# Altium PCB Copy of PCB1.PcbDoc
Units mil, origin at the board's own origin, x right, y up, seen from the top; angles counter-clockwise.
Board outline 6000 x 4000 mil, 2 copper layers (Top Layer, Bottom Layer); 43 components, 27 nets, 114 pads, 5 vias.
Unrouted connection lines stored in the file: 26.
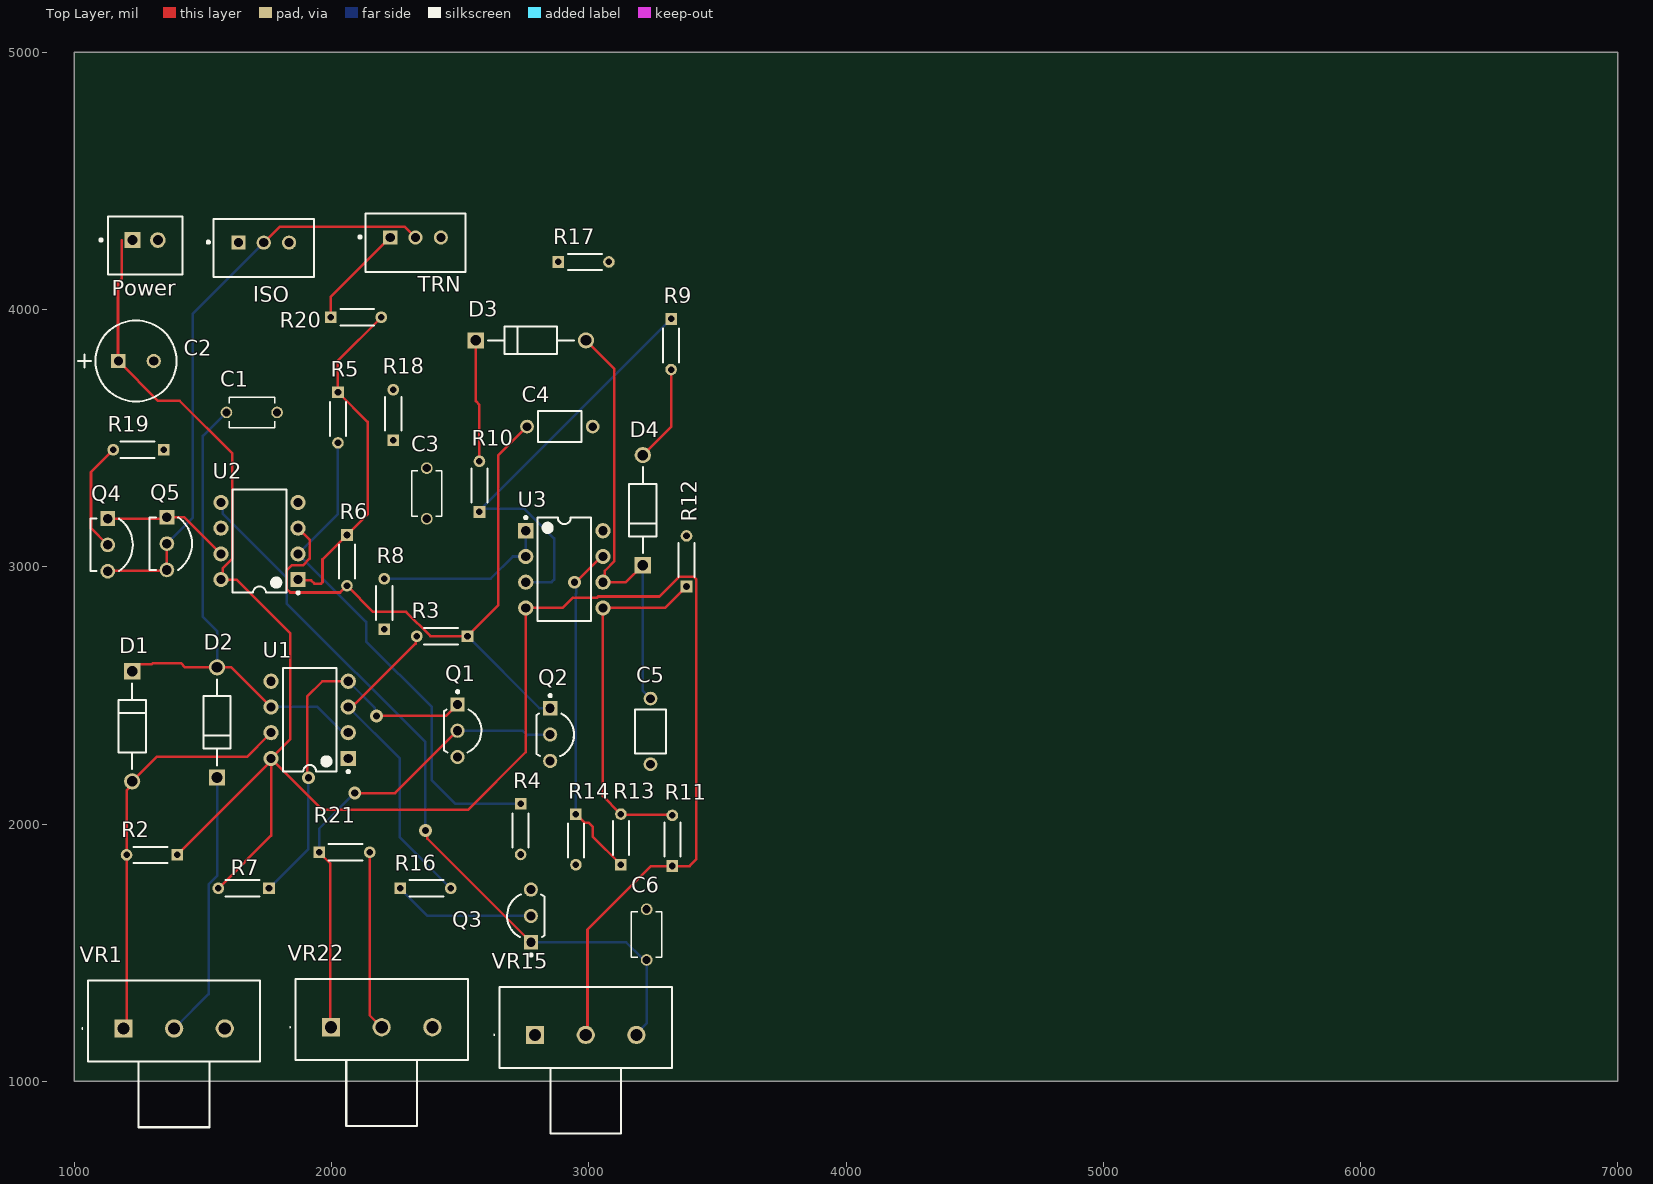
[diagram p0: Top Layer view]
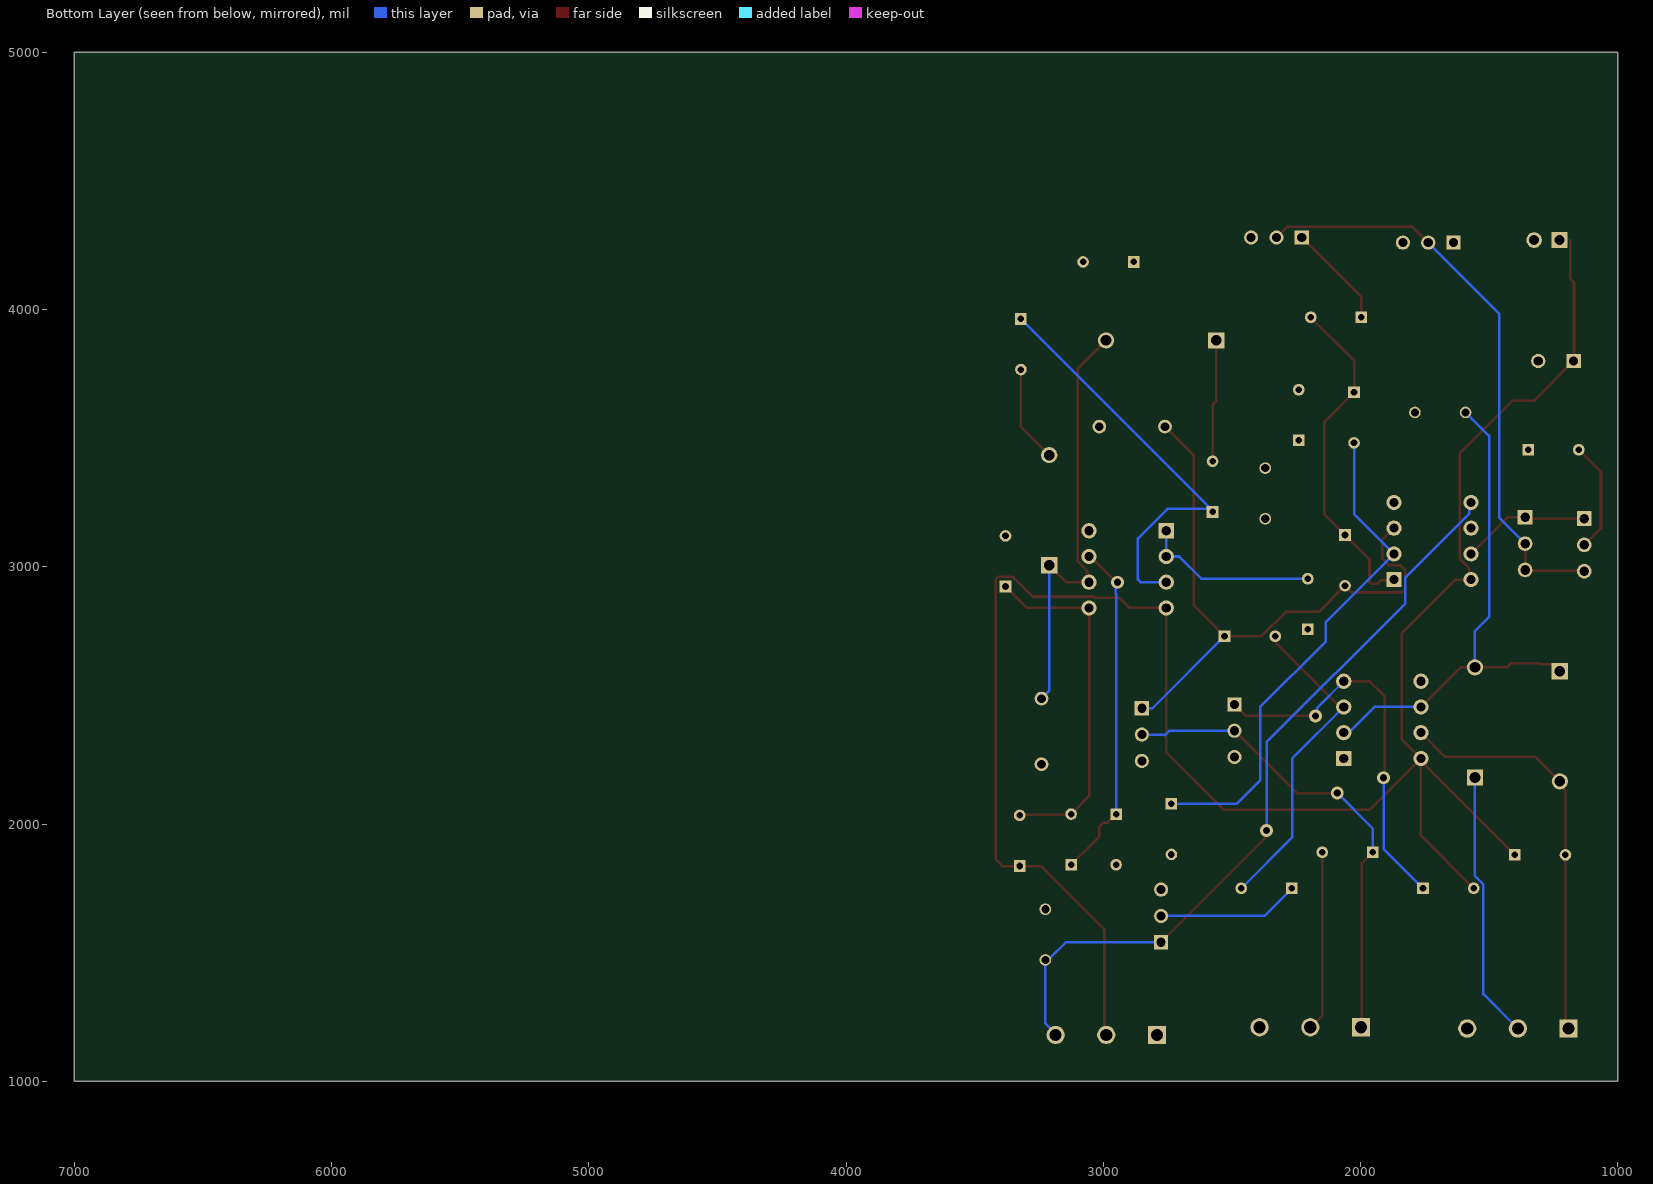
[diagram p1: Bottom Layer view, seen from below]

## Layer stack, top to bottom
Top Solder: solder mask 0.4, Solder Resist, Dk 3.5
Top Layer: signal copper 1.4
Dielectric 1: dielectric 12.6, FR-4, Dk 4.8
Bottom Layer: signal copper 1.4
Bottom Solder: solder mask 0.4, Solder Resist, Dk 3.5

## Board outline
1000,1000 7000,1000 7000,5000 1000,5000

## Design rules (kind name [scope] priority, off if disabled: settings)
Clearance [All] p1: gap=10 ignorepadtopadclearanceinfootprint=FALSE except(0: Arc-Hole Track-Hole SMDPad-Hole THPad-Hole Via-Hole Fill-Hole Poly-Hole Region-Hole Text-Hole)
PolygonConnect [All] p1: connectstyle=Relief reliefconductorwidth=10 reliefentries=4 polygonreliefangle="90 Angle" airgapwidth=10
RoutingVias [All] p1: holewidth=28 width=50 viastyle="Through Hole" minholewidth=28 minwidth=50 maxholewidth=28 maxwidth=50
SolderMaskExpansion [All] p1: expansion=4 istentingtop=FALSE
Width [All] p1: maxlimit=10 minlimit=10 preferedwidth=10
30 further rules are at their usual default settings.

## Components (designator, comment, footprint, x,y, rotation, side; value= is the part's Value field where it differs from the comment)
C1 "FG24X7R1A106KRT00" CAPRB500W50L450T300H550 1690,3600 r180 top
C2 "ECA-2AM470" CAPPR65-350-1150X800X1250 1240,3800 r0 top
C3 "FG24X7R1A106KRT00" CAPRB500W50L450T300H550 2370,3285 r90 top
C4 "SA115C104KAR" AVX-SA115C104KAR 2887.56,3545 r0 top
C5 "SA115C104KAR" AVX-SA115C104KAR 3240,2360 r90 top
C6 "FG24X7R1A106KRT00" CAPRB500W50L450T300H550 3225,1570 r90 top
D1 "1N4001-E3/54" FP-1N4001-E3-54-MFG 1225,2380 r270 top
D2 "1N4001-E3/54" FP-1N4001-E3-54-MFG 1555,2395 r90 top
D3 "1N4001-E3/54" FP-1N4001-E3-54-MFG 2775,3880 r0 top
D4 "1N4001-E3/54" FP-1N4001-E3-54-MFG 3210,3220 r90 top
OSI "to osilascope" FP-B3B-XH-A_LF_SN-MFG 1736.57,4239.33 r0 top
Power "B2B-XH-A(LF)(SN)" FP-B2B-XH-A_LF_SN-MFG 1275.79,4249.33 r0 top
Q1 "P2N2222ARL1G" ONSC-TO-92-3-29-11_AM_BL 2490,2362.64 r270 top
Q2 "P2N2222ARL1G" ONSC-TO-92-3-29-11_AM_BL 2850,2347.64 r270 top
Q3 "P2N2222ARL1G" ONSC-TO-92-3-29-11_AM_BL 2775,1642.64 r90 top
Q4 "2N3906TF" FP-135AR-MFG 1144.96,3085 r0 top
Q5 "2N3906TF" FP-135AR-MFG 1375,3090 r0 top
R2 "MRS16000C2002FCT00" FP-MRS1600-MFG 1301.57,1880 r180 top
R3 "MRS16000C2002FCT00" FP-MRS1600-MFG 2430,2730 r180 top
R4 "MRS16000C2002FCT00" FP-MRS1600-MFG 2735,1980 r270 top
R5 "MRS16000C2002FCT00" FP-MRS1600-MFG 2025,3580 r270 top
R6 "MRS16000C2002FCT00" FP-MRS1600-MFG 2060,3025 r270 top
R7 "MRS16000C2002FCT00" FP-MRS1600-MFG 1658.43,1750 r180 top
R8 "MRS16000C2002FCT00" FP-MRS1600-MFG 2205,2855 r90 top
R9 "MRS16000C2002FCT00" FP-MRS1600-MFG 3320,3865 r270 top
R10 "MRS16000C2002FCT00" FP-MRS1600-MFG 2575,3311.57 r90 top
R11 "MRS16000C2002FCT00" FP-MRS1600-MFG 3325,1935 r90 top
R12 "MRS16000C2002FCT00" FP-MRS1600-MFG 3380,3021.57 r90 top
R13 "MRS16000C2002FCT00" FP-MRS1600-MFG 3125,1940 r90 top
R14 "MRS16000C2002FCT00" FP-MRS1600-MFG 2950,1940 r270 top
R16 "MRS16000C2002FCT00" FP-MRS1600-MFG 2365,1750 r0 top
R17 "MRS16000C2002FCT00" FP-MRS1600-MFG 2980,4185 r0 top
R18 "MRS16000C2002FCT00" FP-MRS1600-MFG 2240,3590 r90 top
R19 "MRS16000C2002FCT00" FP-MRS1600-MFG 1250,3455 r180 top
R20 "MRS16000C2002FCT00" FP-MRS1600-MFG 2095,3970 r0 top
R21 "MRS16000C2002FCT00" FP-MRS1600-MFG 2050,1890 r0 top
TRN "B3B-XH-A(LF)(SN)" FP-B3B-XH-A_LF_SN-MFG 2326.57,4259.33 r0 top
U1 "NE555P" P0008A 1915,2405 r180 top
U2 "NE5532N" ONSC-PDIP-8-626-05 1720,3100 r180 top
U3 "TL072CP" P0008A 2905,2990 r0 top
VR1 "PTN16-B50120K1A1" PTN16B50120K1A1 1191.3,1205 r180 top
VR15 "PTN16-B50120K1A1" PTN16B50120K1A1 2791.3,1180 r180 top
VR22 "PTN16-B50120K1A1" PTN16B50120K1A1 1998.15,1210 r180 top

## Footprints (in the part's own frame and the unit in brackets; to place one, negate y for a bottom-side part, rotate by r counter-clockwise, add the part's x,y. Pads: shape width x height; smd on the part's side, far side on the other; paste and mask are expansions set on the pad)
AVX-SA115C104KAR [mm] "THD, 2-Leads, Dia 3.05mm, Body Length 4.32mm"
  round 1.35 hole 0.85: 1(-3.24,0) 2(3.24,0)
  silkscreen extent -2.16,-1.53 2.16,1.53, body extent -3.53,-1.52 3.53,1.52, height 3.05
CAPPR65-350-1150X800X1250 [mm] "THD, 2-Leads, Dia 8mm, Body 11.5mm"
  rect 1.4x1.4 hole 0.9: 1(-1.75,0)
  round 1.4 hole 0.9: 2(1.75,0)
  silkscreen extent -5.71,-4 4,4, body extent -4,-4 4,4, height 12.5
CAPRB500W50L450T300H550 [mm]
  round 1.15 hole 0.8: 1(-2.5,0) 2(2.5,0)
  silkscreen extent -2.25,-1.5 2.25,1.5, body extent -2.75,-1.5 2.75,1.5, height 2.75
FP-1N4001-E3-54-MFG [mm]
  rect 1.6x1.6 hole 1.05 paste-1000 mask+0: 1(-5.438,0)
  round 1.6 hole 1.05 paste-1000 mask+0: 2(5.438,0)
  silkscreen extent -4.24,-1.35 4.24,1.35, body extent -6.34,-1.45 6.34,1.45, height 0.25
FP-135AR-MFG [mm]
  rect 1.45x1.45 hole 0.95 paste-1000 mask+0: 1(-0.38,2.6)
  round 1.45 hole 0.95 paste-1000 mask+0: 2(-0.38,0) 3(-0.38,-2.6)
  silkscreen extent -2.09,-2.6 2.09,2.6, body extent -2.19,-3.42 2.19,3.42, height 0.25
FP-B2B-XH-A_LF_SN-MFG [mm]
  rect 1.55x1.55 hole 1 paste-1000 mask+0: 1(-1.25,0.525)
  round 1.55 hole 1 paste-1000 mask+0: 2(1.25,0.525)
  silkscreen extent -4.5,-2.88 3.7,2.88, body extent -3.8,-2.98 3.8,2.98, height 0.25
FP-B3B-XH-A_LF_SN-MFG [mm]
  rect 1.4x1.4 hole 0.9 paste-1000 mask+0: 1(-2.5,0.525)
  round 1.4 hole 0.9 paste-1000 mask+0: 2(0,0.525) 3(2.5,0.525)
  silkscreen extent -5.6,-2.88 4.95,2.88, body extent -5.05,-2.98 5.05,2.98, height 0.25
FP-MRS1600-MFG [mm]
  rect 1.15x1.15 hole 0.65 paste-1000 mask+0: 1(-2.5,0)
  round 1.15 hole 0.65 paste-1000 mask+0: 2(2.5,0)
  silkscreen extent -1.55,-0.8 1.8,0.8, body extent -3.17,-0.9 3.17,0.9, height 0.25
ONSC-PDIP-8-626-05 [mm] "DIP, 8-Leads, Body 10.15x7.1mm, Pitch 2.54mm"
  rect 1.5x1.5 hole 0.9: 1(-3.81,3.81)
  round 1.5 hole 0.9: 2(-3.81,1.27) 3(-3.81,-1.27) 4(-3.81,-3.81) 5(3.81,-3.81) 6(3.81,-1.27) 7(3.81,1.27) 8(3.81,3.81)
  silkscreen extent -3.94,-5.1 2.65,5.23, body extent -3.95,-5.07 3.95,5.07, height 5.33
ONSC-TO-92-3-29-11_AM_BL [mm] "TO, 3-Leads, Body Dia 4.7mm, Pitch 2.6mm"
  rect 1.4x1.4 hole 0.9: 1(-2.6,0)
  round 1.4 hole 0.9: 2(0,0) 3(2.6,0)
  silkscreen extent -3.97,-1.34 2.13,2.35, body extent -2.84,-1.34 2.84,2.35, height 5.33
P0008A [mm] "DIP, 8-Leads, Body 10.15x6.6mm, Pitch 2.54mm"
  rect 1.5x1.5 hole 0.9: 1(-3.81,3.81)
  round 1.5 hole 0.9: 2(-3.81,1.27) 3(-3.81,-1.27) 4(-3.81,-3.81) 5(3.81,-3.81) 6(3.81,-1.27) 7(3.81,1.27) 8(3.81,3.81)
  silkscreen extent -3.94,-5.1 2.65,5.23, body extent -3.95,-5.07 3.95,5.07, height 5.08
PTN16B50120K1A1 [mm]
  rect 1.8x1.8 hole 1.2: 1(0,0)
  round 1.8 hole 1.2: 2(-5,0) 3(-10,0)
  silkscreen extent -13.5,-4.75 4.1,9.75

## Part data
C1 C3 C6: "10 ÂµF Â±10% 10V Ceramic Capacitor X7R Radial", Package="Radial TDK", Availability="In Stock", Check_prices=https://www.snapeda.com/parts/FG24X7R1A106KRT00/TDK/view-part/?ref=eda, MF=TDK, MP=FG24X7R1A106KRT00, Price=None, Purchase-URL=https://pricing.snapeda.com/search/part/FG24X7R1A106KRT00/?ref=eda, SnapEDA_Link=https://www.snapeda.com/parts/FG24X7R1A106KRT00/TDK/view-part/?ref=snap
C2: library part CMP-1665-00041-1, "Aluminum Electrolytic Capacitor, 47 uF, +/- 20%, 100 V, -40 to 85 degC, 2-Pin THD, RoHS, Bulk", Case\Package=QFN, Max Operating Temperature="70 degC", Min Operating Temperature="-20 degC", Nominal Supply Voltage="3.3 V", Package Quantity=500, ComponentLink1Description="Manufacturer URL", ComponentLink1URL=http://www.panasonic.com/, ComponentLink2Description=Datasheet, ComponentLink2URL=http://industrial.panasonic.com/cdbs/www-data/pdf/RDF0000/ABA0000C1047.pdf, Data Rate="54 mbps", DatasheetVersion=Mar-16, Length="7.7 mm", Mount="Surface Mount", PackageDescription="2-Pin Radial Lead, Dia 8 mm, Body Length 11.5 mm", PackageReference=CAPPR65-350-1150X800X1250, Packaging="Tape and Reel", Pins=48, Radiation Hardening=No, RoHSCompliant=true
C4 C5: library part CMP-2000-07029-1, "Axial Leads / SpinGuard(R), Ceramic Capacitor, 0.10 uF +/- 10%, 50V, -55 to 125 degC, 2-Pin THD, RoHS, Tape and Reel", Capacitance=0.1µF, Manufacturer=AVX, Operating Temperature=-55°C~125°C, Package / Case=Axial, Package Description="2-Pin Axial Lead, Dia 3.05 mm, Body Length 4.32 mm", Ratings=-, Standard Package=1, Temperature Coefficient=X7R, Tolerance=±10%, Voltage - Rated=50V, Applications=GeneralPurpose, Catalog Drawings=SASeries_4.32x3.05, Category=Capacitors, Datasheet URL=https://datasheet.ciiva.com/27051/1074183-27051369.pdf, Datasheet Version=06/2007, Family=CeramicCapacitors, Features=-, Height - Seated (Max)=-, Lead Spacing=-, Lead Style=-, Manufacturer URL=http://www.avx.com/, Mounting Technology=ThroughHole, Mounting Type=ThroughHole, Online Catalog=SpinGuard®SASeries, Other Names=478-3151-1, Package Reference=SA115C104KAR, Packaging=-, Product Training Modules=ComponentSolutionsforSmartMeterApplications, Series=SpinGuard®SA, Size / Dimension="0.120\"Diax0.170\"L(3.05mmx4.32mm)", Thickness (Max)=-
D1 D2 D3 D4: library part CMP-02540-000077-1, "DIODE GEN PURP 50V 1A DO204AL", Average Rectified Current=1A, Capacitance=15pF, Case/Package=DO-204AL, Forward Voltage=1.1V, Max Forward Surge Current (Ifsm)=30A, Max Operating Temperature=150°C, Max Repetitive Reverse Voltage (Vrrm)=50V, Max Reverse Current=5uA, Min Operating Temperature=-50°C, Package Quantity=5500, Peak Non-Repetitive Surge Current=45A, Current=1A, Current Rating=1A, Diameter=2.7mm, Element Configuration=Single, Forward Current=1A, Height=2.7mm, Lead Free="Lead Free", Length=0.204inch, Max Reverse Voltage (DC)=50V, Max Surge Current=30A, Mount="Through Hole", Number of Pins=2, Output Current=1A, Packaging="Tape and Reel", Polarity=Standard, Radiation Hardening=No, Reverse Voltage=50V, RoHS Compliant=Yes, Series=-, Voltage=50V, Voltage Rating (DC)=50V, Width=2.7mm
OSI TRN: library part CMP-17439-000014-3, "CONN HEADER VERT 3POS 2.5MM", Color=Natural, Contact Resistance=20mR, Current Rating=3A, Flammability Rating="UL94 V-0", Housing Color=White, Insulation Resistance=1GR, Max Operating Temperature=85°C, Max Voltage Rating (AC)=250V, Min Operating Temperature=-25°C, Connector Type=Header, Contact Finish - Mating=TIN, Contact Material=Brass, Contact Plating=Tin, Contact Shape=Square, Contact Type="Male Pin", Depth=5.75mm, Fastening Type=Detent, Gender=Male, Housing Material=Polyamide, Insulation Color=Natural, Insulation Material=Nylon, Lead Free="Lead Free", Lead Pitch=2.5mm, Length=9.9mm, Max Current Rating=3A, Max Voltage Rating (DC)=250V, Mount="Through Hole", Number of Contacts=3, Number of Positions=3, Number of Rows=1, Orientation=Straight, Packaging=Bulk, Pitch=2.5mm, REACH SVHC="No SVHC", Series=XH, Termination=Solder, Voltage Rating=250V, Voltage Rating (AC)=250V, Wire/Cable Gauge=22AWG
Power: library part CMP-2000-05888-3, "CONN HEADER VERT 2POS 2.5MM", Color=Natural, Contact Resistance=20mR, Current Rating=3A, Housing Color=White, Insulation Resistance=1GR, Max Operating Temperature=85°C, Max Voltage Rating (AC)=250V, Min Operating Temperature=-25°C, Connector Type="Male Pin", Contact Material=Brass, Contact Plating=Tin, Contact Type="Male Pin", Depth=5.75mm, Fastening Type=Detent, Housing Material=Polyamide, Lead Free="Lead Free", Lead Pitch=2.5mm, Length=7.4mm, Max Current Rating=3A, Max Voltage Rating (DC)=250V, Mount="Through Hole", Number of Contacts=2, Number of Positions=2, Number of Rows=1, Orientation=Straight, Packaging=Bulk, Pitch=2.5mm, REACH SVHC="No SVHC", Series=XH, Termination=Solder, Voltage Rating=250V, Voltage Rating (AC)=250V, Wire/Cable Gauge=22AWG
Q1 Q2 Q3: library part CMP-1048-01587-1, "Amplifier Transistor, NPN Silicon, 3-Pin TO-92, Pb-Free, Tape and Reel", Manufacturer="On Semiconductor", ComponentLink1Description="Manufacturer URL", ComponentLink1URL=http://www.onsemi.com/, ComponentLink2Description=Datasheet, ComponentLink2URL=http://www.onsemi.com/pub_link/Collateral/P2N2222A-D.PDF, ComponentLink3Description="Package Specification", ComponentLink3URL=http://www.onsemi.com/pub_link/Collateral/MAC97-D.PDF, DatasheetVersion="Rev. 7", fT Min (MHz)=300, IC Continuous (A)=0.6, Mounting Technology="Through Hole", PackageDescription="3-Pin Transistor Outline, Body 4.825 x 3.685 mm, Pitch 1.27 mm", PackageReference=TO-92-3-29-11_AM_BL, PackageVersion="Rev. AM", Packing="Tape and Reel", PartNumber=P2N2222ARL1G, Polarity=NPN, RoHS=TRUE
Q4 Q5: library part CMP-00278-84408866-1, "2N3906TF Small Signal Bipolar Transistor, 0.2A I(C), 40V V(BR)CEO, 1-Element, PNP, Silicon, TO-92", Case/Package=TO-92, Collector Base Voltage (VCBO)=-40V, Collector Emitter Saturation Voltage=-400mV, Current Rating=-200mA, Emitter Base Voltage (VEBO)=-5V, Frequency=250MHz, Manufacturer Lifecycle Status=ACTIVE, Max Breakdown Voltage=160V, Max Junction Temperature (Tj)=150°C, Max Power Dissipation=625mW, Min Operating Temperature=-55°C, Collector Emitter Breakdown Voltage=-40V, Collector Emitter Voltage (VCEO)=-40V, Element Configuration=Single, Gain Bandwidth Product=250MHz, Height=5.33mm, hFE Min=100, Lead Free="Lead Free", Length=5.2mm, Lifecycle Status=Production, Max Collector Current=-200mA, Max Frequency=250MHz, Max Operating Temperature=150°C, Mount="Through Hole", NexarPartId=84408866, Number of Elements=1, Number of Pins=3, Packaging="Tape and Reel", Polarity=PNP, Power Dissipation=625mW, Radiation Hardening=No, REACH SVHC="No SVHC", RoHS=Compliant, Schedule B=8541210080, Transition Frequency=250MHz, Voltage Rating (DC)=-40V, Weight=240mg, Width=4.19mm
R2 R3 R4 R5 R6 R7 R8 R9 R10 R11 R12 R13 R14 R16 R17 R18 R19 R20 R21: library part CMP-02408-000019-1, "RES 20K OHM 0.4W 1% AXIAL", Case/Package=Conformal, Max Operating Temperature=155°C, Max Power Dissipation=400mW, Min Operating Temperature=-55°C, Resistance=20kR, Resistor Type="Metal Film", Temperature Coefficient=50ppm/°C, Tolerance=1%, Construction=Cylindrical, Contact Plating=Tin, Diameter=1.6mm, Length=3.6mm, Military Standard=Not, Mount="Through Hole", Number of Terminations=2, Packaging="Tape and Reel", Power Rating=400mW, Radiation Hardening=No, RoHS Compliant=Yes, Series=MRS16, Technology="THIN FILM", Termination=Axial
U1: library part CMP-2000-04954-1, "Precision Timer, 4.5 to 16 V, 0 to 70 degC, 8-Pin DIP, Pb-Free, Tube", Manufacturer=TexasInstruments, Maximum High Level Output Current=-200mA, Maximum Low Level Output Current=200mA, Operating Supply Voltage=5, Package=8PDIP, Package Description="8-Pin Double In-line Package, Body 9.59 x 6.35 mm, Pitch 2.54 mm", Package Reference=P8, Category=Timer, Datasheet URL=http://www.ti.com/general/docs/lit/getliterature.tsp?genericPartNumber=NE555&fileType=pdf, Datasheet Version="Rev. I, 09/2014", Manufacturer URL=http://www.ti.com/, Number of Internal Timers=1, Package URL=http://www.ti.com/lit/ml/mpdi001b/mpdi001b.pdf, Packaging=Rail/Tube, Rad Hard=No, Type=Standard
U2: library part CMP-1310-00070-1, "Internally Compensated Dual Low Noise Operational Amplifier, 6 to 40 V, 0 to 70 degC, 8-Pin PDIP, Tube", Manufacturer="On Semiconductor", ComponentLink1Description="Manufacturer URL", ComponentLink1URL=http://www.onsemi.com/, ComponentLink2Description=Datasheet, ComponentLink2URL=http://www.onsemi.cn/pub_link/Collateral/NE5532-D.PDF, ComponentLink3Description="Package Specification", ComponentLink3URL=http://www.onsemi.cn/pub_link/Collateral/626-05.PDF, DatasheetVersion="Rev. 2", GBW Typ (MHz)=10, Mounting Technology="Through Hole", PackageDescription="8-Pin Plastic Dual-In Line Package, Body 9.59 x 6.605 mm, Pitch 2.54 mm", PackageReference=PDIP-8-626-05, PackageVersion="Rev. N, 06/2013", Packing=Tube, PartNumber=NE5532N, RoHS=FALSE, SR Typ (V/uS)=9, VCC Max (V)=40, VCC Min (V)=6
U3: library part CMP-0017-00950-2, "Dual Low-Noise JFET-Input General-Purpose Operational Amplifier, 7 to 36 V, 0 to 70 degC, 8-pin DIP (P8), Pb-Free (RoHS)", Manufacturer="Texas Instruments", Rating=Catalog, Total Supply Voltage(Max)(+5V is 5, +/-5V is 10)=36, Total Supply Voltage(Min)(+5V is 5, +/-5V is 10)=7, CMRR(Min)(dB)=70, Code_JEDEC=MS-001, ComponentLink1Description="Manufacturer URL", ComponentLink1URL=http://www.ti.com/, ComponentLink2Description=Datasheet, ComponentLink2URL=http://www.ti.com/lit/ds/symlink/tl072.pdf, ComponentLink3Description="Package Specification", ComponentLink3URL=http://www.ti.com/litv/pdf/mpdi001b, DatasheetVersion=SLOS080J, Eco-Plan="Pb-Free (RoHS)", GBW(Typ)(MHz)=3, IIB(Max)(pA)=200, Iq per channel(Max)(mA)=2.5, Mounting Technology="Through Hole", Number of Channels=2, Offset Drift(Typ)(uV/C)=18, PackageDescription="8-Pin Plastic In-Line, Body 9.59 x 6.35 mm, Pitch 2.54 mm", PackageReference=P0008A, PackageVersion="4040082/E, 04/2010", PartNumber=TL072CP, Slew Rate(Typ)(V/us)=13, Sub Family="General Purpose Amplifier, High Supply Voltage Amplifier (>=30V)", Vio (25C)(Max)(mV)=10, Vn at 1kHz(Typ)(nV/rtHz)=18
VR1 VR15 VR22: "Variable Resistor", Manufacturer_Name="CUI Devices", Datasheet Link=https://www.cuidevices.com/product/resource/ptn16.pdf, Height=26.75mm, Manufacturer_Part_Number=PTN16-B50120K1A1

## Via types
v1: diameter 50, hole 28, Top Layer to Bottom Layer, 5 vias

## Nets (pads, with @x,y where several pads share a name; then routed paths per layer and width w, separated by ;. In a path a pad name is that pad's centre, name@x,y a point inside that pad or via, vN(x,y) a via of type N, cw(c..) or ccw(c..) an arc to the next point about the centre after c; other vN are vias at no path point)
GND: C1.1 C2.2 C3.2 C4.2 C5.1 C6.2 OSI.1 Power.2 Q1.3 Q2.3 Q3.3 R4.2 R12.2 R14.2 R17.2 R19.1 TRN.3 U1.1 U2.4 U3.8
NetC1_2: C1.2 D1.1 D2.2 U1.2 U1.6 | length 2035
  Top Layer w10: D1.1@1215.91,2585 D1.1 1251.5,2620.59 1300.59,2620.59 1305,2625 1414.88,2625 1430.78,2609.09 D2.2 1610.91,2609.09 1755,2465 1765,2465 U1.6
  Bottom Layer w10: D2.2 1555,2750 1500,2805 1500,3508.43 C1.2 ; U1.6 1945,2455 2040,2360 2060,2360 U1.2
NetC3_1: C3.1 U1.5
NetC4_1: C4.1 Q2.1 R3.1 R6.2 U2.3 | length 2466.2
  Top Layer w10: U2.3 1914.53,3105.47 1914.53,3031.56 1888.44,3005.47 1845.2,3005.47 1825.47,2985.74 1825.47,2914.26 1839.73,2900 2033.35,2900 2059.92,2926.57 R6.2 2161.66,2824.91 2289.89,2824.91 2384.8,2730 R3.1 2648.9,2850.48 2648.9,3433.9 C4.1
  Bottom Layer w10: R3.1 2808.43,2450 Q2.1
NetC5_2: C5.2 D3.2 D4.1 U3.6 | length 1718.8
  Top Layer w10: D3.2 3099.53,3769.57 3099.53,3021.56 3062.5,2984.53 3062.5,2947.5 U3.6 3144.09,2940 D4.1
  Bottom Layer w10: D4.1 3210,2517.56 3230,2497.56 3230,2495 3237.44,2487.56 C5.2
NetC6_1: C6.1 Q3.1 U2.5 VR15.3 | length 3002.3
  Top Layer w10: v1(2365,1975) 2372.65,1967.35 2372.65,1942.62 Q3.1
  Bottom Layer w10: U2.5 1577.5,3242.5 1577.5,3205.47 1825.47,2957.5 1825.47,2857.5 2365,2317.97 v1(2365,1975) ; Q3.1 3144.72,1540.28 3206.68,1478.32 3208.7,1478.32 C6.1@3220,1467.03 ; VR15.3 3185,1175 3190,1180 3190,1189.82 3225,1224.82 C6.1
NetD1_2: D1.2 R2.2 U1.7 VR1.1 | length 1608
  Top Layer w10: VR1.1@1185,1200 VR1.1@1190,1205 ; VR1.1 VR1.1@1190,1205 ; U1.7 1755,2355 1755,2345 1670.83,2260.83 1319.92,2260.83 D1.2 1225,2151.57 1203.15,2129.72 R2.2 1203.15,1218.15 VR1.1@1190,1205
NetD2_1: D2.1 VR1.2 | length 1046.1
  Bottom Layer w10: VR1.2 1390,1205 1395,1210 1395,1211.85 1522.36,1339.21 1522.36,1765.59 1555,1798.23 D2.1
NetD3_1: D3.1 R10.2 | length 478.5
  Top Layer w10: D3.1 2560.91,3643.57 2575,3629.48 2575,3413.95 2577.47,3411.48 2576,3410 R10.2
NetD4_2: D4.2 R9.2 | length 378
  Top Layer w10: D4.2 3320,3544.09 R9.2
NetOSI_2: OSI.2 Q4.3 Q5.2 Q5.3 TRN.2 | length 2303.6
  Top Layer w10: Q4.3 1132.5,2985.14 1360.14,2985.14 1362.64,2987.64 Q5.3@1361.34,2987.64 ; Q5.3 Q5.3@1361.34,2987.64 ; Q5.2 1360.04,2988.94 Q5.3@1361.34,2987.64 ; OSI.2 1799.13,4322.56 2284.02,4322.56 2320,4286.57 2320,4280 TRN.2
  Bottom Layer w10: Q5.2 1460,3189.96 1460,3983.43 OSI.2
NetOSI_3: OSI.3 Q4.2 R19.2 | length 432.8
  Top Layer w10: Q4.2 1065,3150 1065,3368.43 R19.2
NetQ1_1: Q1.1 R7.1 U1.4 | length 1509.6
  Top Layer w10: v1(1910,2180) 1905,2185 1905,2495 1965,2555 U1.4 ; v1(2175,2420) 2445,2420 Q1.1
  Bottom Layer w10: R7.1 1910,1903.15 v1(1910,2180) ; U1.4 2167.35,2452.65 2167.35,2427.65 v1(2175,2420)
NetQ1_2: Q1.2 Q2.2 R21.1 VR22.1 | length 1905.5
  Top Layer w10: R21.1 1995,1846.57 1995,1185 1998.15,1188.15 VR22.1 ; v1(2090,2120) 2247.36,2120 Q1.2
  Bottom Layer w10: R21.1 1951.57,1981.57 v1(2090,2120) ; Q1.2 2742.36,2362.64 2760,2345 2762.64,2347.64 Q2.2
NetQ3_2: Q3.2 R16.1 | length 555.1
  Bottom Layer w10: R16.1 2373.94,1642.64 2767.36,1642.64 2770,1640 2772.64,1642.64 Q3.2
NetQ4_1: Q4.1 Q5.1 R18.1 U2.7 | length 501
  Top Layer w10: Q4.1 1355.04,3187.36 Q5.1 1427.64,3192.36 U2.7
NetR3_2: R3.2 R16.2 U1.3 | length 1265.8
  Top Layer w10: U1.3 2078.27,2455 2092.26,2468.99 2093.99,2468.99 2326.67,2701.67 2326.67,2725.1 R3.2
  Bottom Layer w10: U1.3 2265.53,2254.47 2265.53,1947.89 R16.2 R16.2@2465,1750
NetR4_1: R4.1 R5.2 U2.2 | length 1974.1
  Bottom Layer w10: R5.2 2025,3205 U2.2 2134.69,2785.31 2134.69,2710.31 2390,2455 2390,2170 2481.57,2078.43 R4.1
NetR5_1: R5.1 R6.1 R20.2 U2.1 | length 1323.9
  Top Layer w10: U2.1 1873.05,2946.95 1920.43,2946.95 1933.24,2934.14 1959.14,2934.14 1965,2940 1965,3028.43 R6.1 2140,3203.43 2140,3563.43 R5.1 2025,3801.57 R20.2
NetR8_1: R8.1 R21.2 VR22.2 | length 714.3
  Top Layer w10: R21.2 2148.43,1256.57 VR22.2 VR22.2@2195,1195
NetR8_2: R8.2 U3.1 U3.2 | length 685.9
  Bottom Layer w10: R8.2 2618.43,2953.43 2705,3040 U3.2 U3.1
NetR9_1: R9.1 R10.1 U3.3 | length 1661
  Bottom Layer w10: R10.1 R10.1@2586.85,3225 ; U3.3 2855,2940 2865,2950 2865,3110.27 2750.27,3225 R10.1@2586.85,3225 ; R9.1 3320,3960 3316.57,3960 2592.64,3236.06 2592.64,3230.79 R10.1@2586.85,3225
NetR11_2: R11.2 R12.1 R13.2 U3.5 | length 1394.1
  Top Layer w10: R11.2 3322.5,2035.93 3127.5,2035.93 R13.2 3121.57,2038.43 3120,2040 3120,2043.43 3055,2108.43 U3.5 3296.85,2840 R12.1
NetR13_1: R13.1 R14.1 U3.7 | length 1334.8
  Top Layer w10: v1(2945,2940) 2950,2940 3050,3040 U3.7 ; R14.1 2983.03,2005.39 2999.61,2005.39 3015,1990 3015,1951.57 R13.1
  Bottom Layer w10: v1(2945,2940) 2950.82,2934.18 2950.82,2895 2950,2894.18 R14.1
NetR17_1: R17.1 R18.2 U2.6
NetR20_1: R20.1 TRN.1 | length 405.9
  Top Layer w10: R20.1 1996.57,4048.43 TRN.1
VCC: C2.1 Power.1 R2.1 R7.2 R11.1 U1.8 U2.8 U3.4 VR15.2 | length 8037.2
  Top Layer w10: 1185,4270 1185,4120 1170,4105 1170,3801.1 C2.1 1326.1,3645 1410,3645 1614.53,3440.47 1614.53,3031.56 1577.5,2994.53 1577.5,2957.5 U2.8 1630,2950 1840,2740 1840,2330 U1.8 1965,2055 2530,2055 2755,2280 U3.4 2898.6,2840 2938.6,2880 3032.03,2880 3036.56,2884.53 3274.89,2884.53 3351.15,2960.79 3408.85,2960.79 3417.64,2952 3417.64,1862.64 3391.57,1836.57 R11.1 3241.57,1836.57 2995,1590 2995,1186.85 VR15.2 ; R2.1 1765,2245 1765,1955 R7.2
  Top Layer w12: U1.8@1765,2245 U1.8
pads on no net: VR1.3 VR15.1 VR22.3

## Silkscreen, mask and mechanical layers (free items; w line width, h text height)
Mechanical 1:
  lines w47.24: 1025,1025 3475,1025 3475,4440 1025,4440 1025,1025